# Altium PCB SC16IS740.PcbDoc
Units mm, origin at the board's own origin, x right, y up, seen from the top; angles counter-clockwise.
Board outline 152.4 x 101.6 mm, 2 copper layers (Top Layer, Bottom Layer); 15 components, 11 nets, 32 pads, 3 vias.
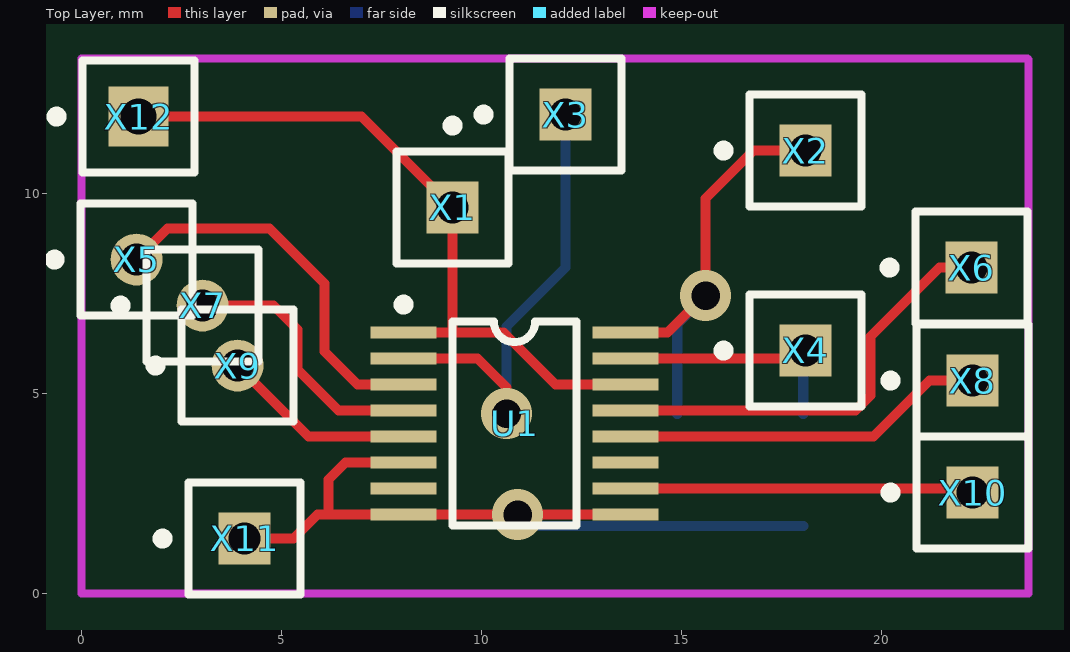
[diagram p0: Top Layer view]
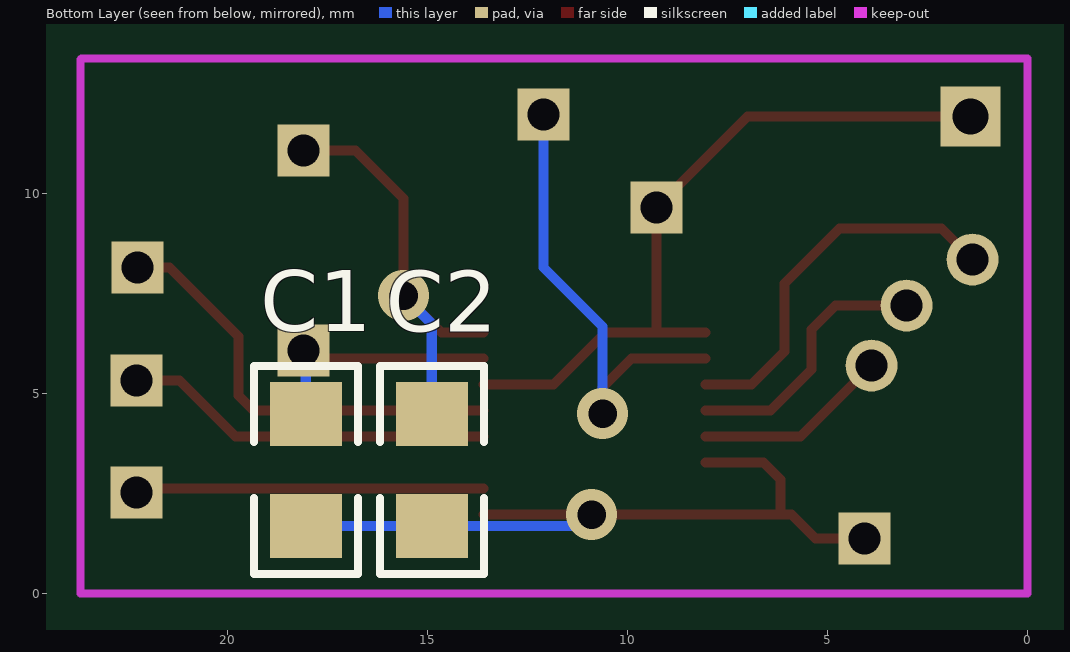
[diagram p1: Bottom Layer view, seen from below]

## Layer stack, top to bottom
Top Layer: signal copper 0.0356
Dielectric: dielectric 0.32, FR-4, Dk 4.8
Bottom Layer: signal copper 0.0356

## Board outline
-26.1,-26.325 126.3,-26.325 126.3,75.275 -26.1,75.275

## Design rules (kind name [scope] priority, off if disabled: settings)
Clearance [All] p1: gap=0.3
ComponentClearance [All] p1: gap=0.254 collisioncheckmode=0
PolygonConnect [All] p1: connectstyle=Relief reliefconductorwidth=0.254 reliefentries=4 polygonreliefangle="90 Angle"
RoomDefinition SC16IS740 [InComponentClass('SC16IS740')] p1: confinementstyle=ConfineIn formatcopy=TRUE outline -51.5,-51.725 -0.7,-51.725 -0.7,-26.325 -51.5,-26.325
RoutingLayers [All] p1: top layer=Horizontal bottom layer=Vertical
RoutingVias [All] p1: holewidth=0.711 width=1.27 viastyle="Through Hole" minholewidth=0.711 minwidth=1.27 maxholewidth=0.711 maxwidth=1.27
SolderMaskExpansion [All] p1: expansion=0.102
TestPointUsage [All] p1: valid=0 allowmultiple=FALSE
Testpoint [All] p1: side=15 testpointundercomponent=TRUE minsize=1.016 maxsize=2.54 preferedsize=1.524 minholesize=0 maxholesize=1.016 preferedholesize=0.813 testpointgrid=0.025 style=1023 order=-539222988
Width [All] p1: maxlimit=0.254 minlimit=0.254 preferedwidth=0.254
16 further rules are at their usual default settings.

## Components (designator, comment, footprint, x,y, rotation, side; value= is the part's Value field where it differs from the comment)
C1 "10pF" _1206 18.05,3.1 r90 bottom
C2 "10pF" _1206 14.9,3.1 r90 bottom
U1 "SC16IS740" TSSO5X6-G16 10.825,4.25 r270 top
X1 "" PIN1#1 9.275,9.65 r0 top
X2 "" PIN1#1 18.1,11.075 r90 top
X3 "" PIN1#1 12.1,11.975 r90 top
X4 "" PIN1#1 18.1,6.075 r90 top
X5 "" PIN1#2 1.375,8.35 r90 top
X6 "" PIN1#1 22.25,8.15 r90 top
X7 "" PIN1#2 3.025,7.2 r90 top
X8 "" PIN1#1 22.275,5.325 r90 top
X9 "" PIN1#2 3.9,5.7 r90 top
X10 "" PIN1#1 22.275,2.525 r90 top
X11 "" PIN1#1 4.075,1.375 r90 top
X12 "" PIN1#3 1.425,11.925 r90 top

## Footprints (in the part's own frame and the unit in brackets; to place one, negate y for a bottom-side part, rotate by r counter-clockwise, add the part's x,y. Pads: shape width x height; smd on the part's side, far side on the other; paste and mask are expansions set on the pad)
_1206 [mm]
  rect 1.6x1.8 smd: 1(-1.412,-0.007) 2(1.388,-0.007)
  silkscreen extent -2.61,-1.31 2.59,1.29
PIN1#1 [mm]
  rect 1.3x1.3 hole 0.8: 1(0,0)
  silkscreen extent -1.4,-1.4 1.4,2.17
PIN1#2 [mm]
  round 1.3 hole 0.8: 1(0,0)
  silkscreen extent -1.4,-1.4 1.4,2.17
PIN1#3 [mm]
  rect 1.5x1.5 hole 0.9: 1(0,0)
  silkscreen extent -1.4,-1.4 1.4,2.17
TSSO5X6-G16 [mm]
  rect 0.3x1.65 smd: 1(-2.275,-2.775) 2(-1.625,-2.775) 3(-0.975,-2.775) 4(-0.325,-2.775) 5(0.325,-2.775) 6(0.975,-2.775) 7(1.625,-2.775) 8(2.275,-2.775) 9(2.275,2.775) 10(1.625,2.775) 11(0.975,2.775) 12(0.325,2.775) 13(-0.325,2.775) 14(-0.975,2.775) 15(-1.625,2.775) 16(-2.275,2.775)
  silkscreen extent -3.1,-2.9 2.55,1.55

## Part data
C1 C2: library part "Cap Semi", "Capacitor"
X1 X2 X3 X4 X5 X6 X7 X8 X9 X10 X11 X12: library part Socket, "Socket"

## Via types
v1: diameter 1.27, hole 0.711, Top Layer to Bottom Layer, 3 vias

## Nets (pads, with @x,y where several pads share a name; then routed paths per layer and width w, separated by ;. In a path a pad name is that pad's centre, name@x,y a point inside that pad or via, vN(x,y) a via of type N, cw(c..) or ccw(c..) an arc to the next point about the centre after c; other vN are vias at no path point)
NetC1_1: C1.1 C2.1 U1.6 U1.8 U1.9 X11.1 | length 20
  Top Layer w0.254: X11.1 5.3,1.375 5.9,1.975 U1.9 ; 6.175,1.975 6.175,2.85 6.6,3.275 U1.6
  Bottom Layer w0.254: v1(10.9,1.975) 11.187,1.688 C1.1
NetC1_2: C1.2 U1.15 X4.1 | length 6.2
  Top Layer w0.254: U1.15 17.9,5.875 X4.1
  Bottom Layer w0.254: C1.2 18.043,6.018 X4.1
NetC2_2: C2.2 U1.16 X2.1 | length 11
  Top Layer w0.254: U1.16 14.65,6.525 15.6,7.475 15.6,9.875 16.8,11.075 X2.1
  Bottom Layer w0.254: C2.2 14.893,6.743 v1(15.6,7.45)
NetU1_1: U1.1 U1.14 X1.1 X12.1 | length 18
  Top Layer w0.254: X12.1 7,11.925 X1.1 9.275,6.525 ; U1.1 10.55,6.525 11.85,5.225 U1.14
NetU1_2: U1.2 X3.1 | length 11.6
  Top Layer w0.254: U1.2 9.9,5.875 10.625,5.15 v1(10.625,4.5)
  Bottom Layer w0.254: v1(10.625,4.5) 10.625,6.675 12.1,8.15 X3.1
NetU1_3: U1.3 X5.1 | length 9.6
  Top Layer w0.254: X5.1 2.15,9.125 4.7,9.125 6.075,7.75 6.075,6.05 6.9,5.225 U1.3
NetU1_4: U1.4 X7.1 | length 6.7
  Top Layer w0.254: X7.1 4.8,7.2 5.4,6.6 5.4,5.6 6.425,4.575 U1.4
NetU1_5: U1.5 X9.1 | length 4.9
  Top Layer w0.254: X9.1 5.675,3.925 U1.5
NetU1_10: U1.10 X10.1 | length 8.7
  Top Layer w0.254: U1.10 22.175,2.625 X10.1
NetU1_12: U1.12 X8.1 | length 9.3
  Top Layer w0.254: U1.12 19.8,3.925 21.2,5.325 X8.1
NetU1_13: U1.13 X6.1 | length 11
  Top Layer w0.254: U1.13 19.35,4.575 19.725,4.95 19.725,6.425 21.45,8.15 X6.1
pads on no net: U1.7 U1.11

## Keep-outs
Keep-Out Layer:
  lines w0.2: 0,0 0,13.375 23.65,13.375 23.675,13.35 23.675,0 0,0

## Silkscreen, mask and mechanical layers (free items; w line width, h text height)
Mechanical 5:
  circle w0.254: c18.079,6.088 r0.36
  circle w0.254: c18.079,11.088 r0.409
  circle w0.254: c9.253,9.63 r0.403
  circle w0.254: c1.375,8.381 r0.311
  circle w0.254: c3.025,7.18 r0.252
  circle w0.254: c3.825,5.93 r0.352
  circle w0.254: c9.152,2.128 r0.305
  circle w0.254: c9.152,7.179 r0.3
  circle w0.254: c14.525,1.375 r0.3
  circle w0.254: c4.051,1.378 r0.304
  circle w0.254: c1.596,3.879 r0.3
  circle w0.254: c-0.504,1.378 r0.3
  circle w0.254: c-1.2,8.08 r0.3
  circle w0.254: c19.096,8.58 r0.4
  lines w0.2: -1.25,13.581 19.755,13.581 ; -0.65,-3.373 -0.65,9.18 ; 2.051,-0.823 19.505,-0.823 19.555,-0.873